# Altium PCB PCB1.PcbDoc
Units mm, origin at the board's own origin, x right, y up, seen from the top; angles counter-clockwise.
Board outline 59.94 x 41.4 mm, 2 copper layers (Top Layer, Bottom Layer); 17 components, 10 nets, 49 pads, 10 vias.
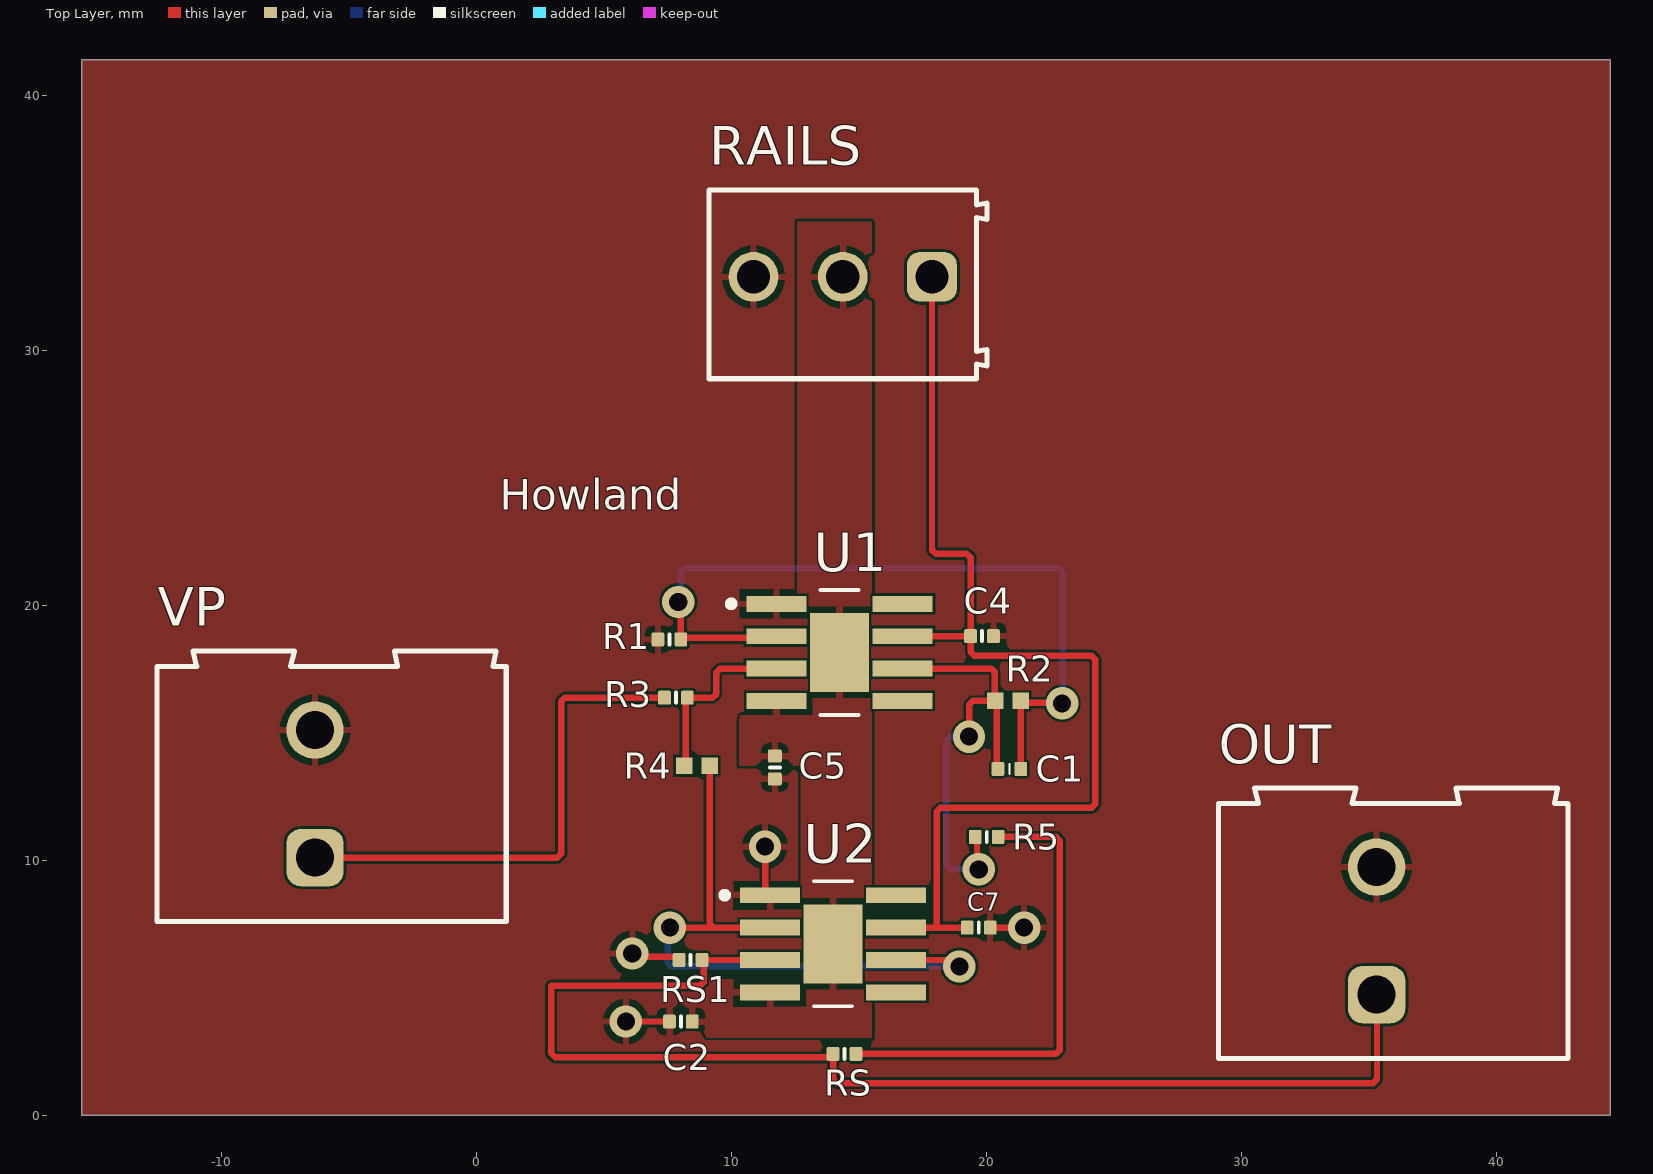
[diagram p0: Top Layer view]
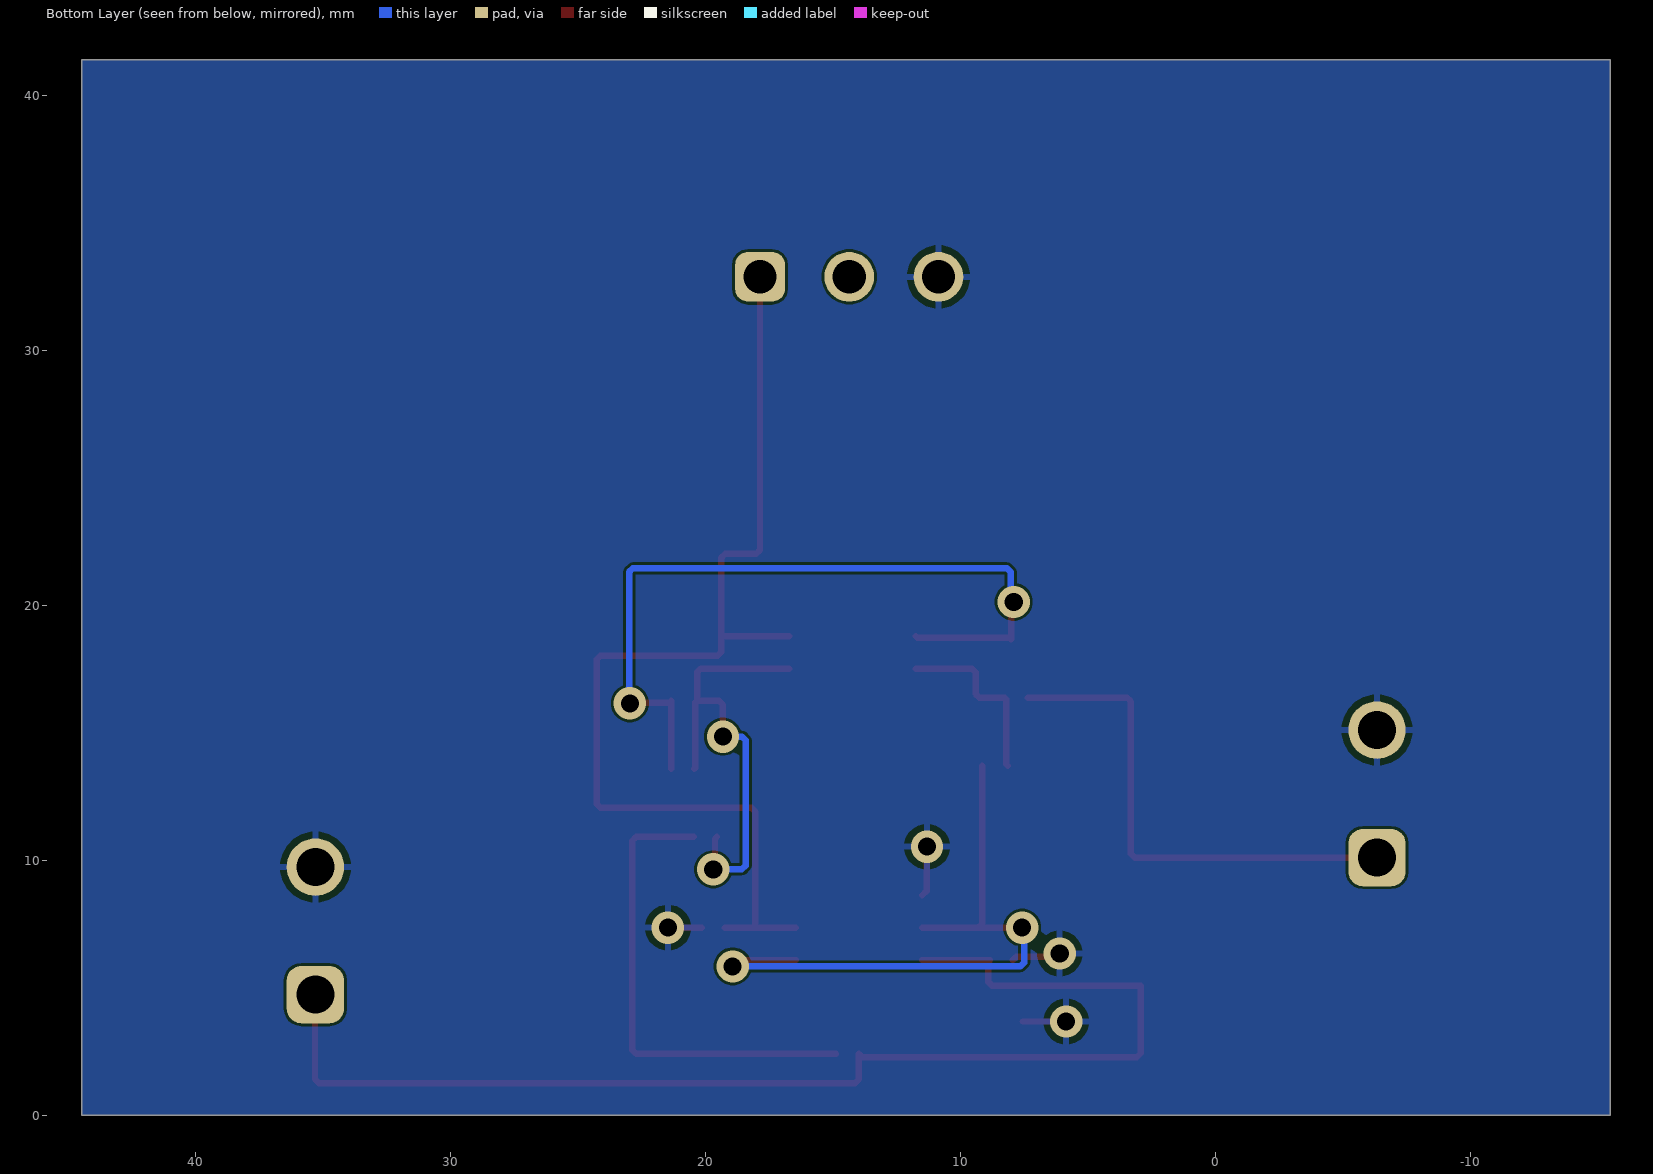
[diagram p1: Bottom Layer view, seen from below]
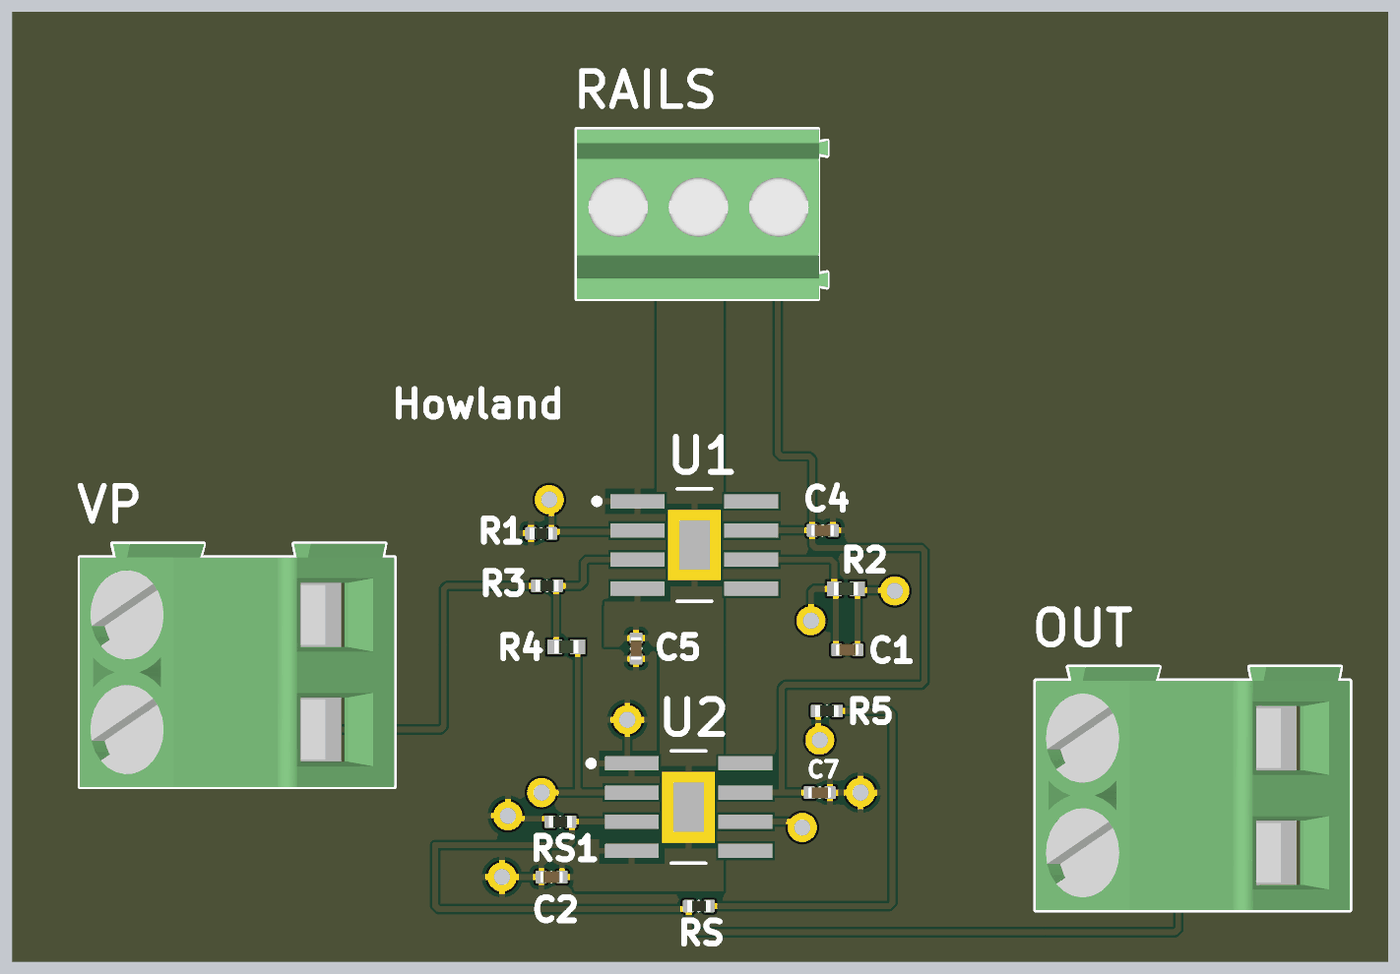
[diagram p2: 3D render of the assembled board from above, using the file's embedded part models]

## Layer stack, top to bottom
Top Solder: solder mask 0.0102, Solder Resist, Dk 3.5
Top Layer: signal copper 0.0356
Dielectric 1: dielectric 0.32, FR-4, Dk 4.8
Bottom Layer: signal copper 0.0356
Bottom Solder: solder mask 0.0102, Solder Resist, Dk 3.5

## Board outline
-15.494,0 44.45,0 44.45,41.402 -15.494,41.402

## Design rules (kind name [scope] priority, off if disabled: settings)
Clearance [All] p1: gap=0.102 ignorepadtopadclearanceinfootprint=FALSE
MinimumSolderMaskSliver [All] p1: minsoldermaskwidth=0.102
PolygonConnect [All] p1: connectstyle=Relief reliefconductorwidth=0.254 reliefentries=4 polygonreliefangle="90 Angle" airgapwidth=0.254
RoutingVias [All] p1: holewidth=0.711 width=1.27 viastyle="Through Hole" minholewidth=0.711 minwidth=1.27 maxholewidth=0.711 maxwidth=1.27
SilkToSilkClearance [All] p1: silktosilkclearance=0.102
SilkToSolderMaskClearance [IsPad] p1: minsilkscreentomaskgap=0.102 clearancetoexposedcopper=TRUE
SolderMaskExpansion [All] p1: expansion=0.102 istentingtop=FALSE
SupplyNets "Schematic Supply Nets_3" [InNet('-30V')] p1: voltage=0.000
SupplyNets "Schematic Supply Nets_2" [InNet('GND')] p2: voltage=0.000
SupplyNets "Schematic Supply Nets_1" [InNet('+30V')] p3: voltage=0.000
SupplyNets "Schematic Supply Nets" [InNet('Vp')] p4: voltage=0.000
Width [All] p1: maxlimit=0.254 minlimit=0.254 preferedwidth=0.254
27 further rules are at their usual default settings.

## Classes and differential pairs
component class HowlandSchematic1: C1 C2 C4 C5 C7 R1 R2 R3 R4 R5 RS RS1 U1 U2

## Components (designator, comment, footprint, x,y, rotation, side; value= is the part's Value field where it differs from the comment)
C1 "Capacitor 22pF +/-10% 50V 0402" "Copy of CAPC0402(1005)60_L" 20.886,13.589 r180 top value=22pF
C2 "Capacitor 100nF +/-20% 25V 0402" CAPC0402(1005)60_L 8.001,3.683 r180 top value=100nF
C4 "Capacitor 100nF +/-20% 10V 0402" CAPC0402(1005)60_L 19.812,18.796 r180 top value=100nF
C5 "Capacitor 100nF +/-20% 25V 0402" CAPC0402(1005)60_L 11.684,13.647 r90 top value=100nF
C7 "Capacitor 100nF +/-20% 10V 0402" CAPC0402(1005)60_L 19.685,7.366 r180 top value=100nF
OUT "691211720002" 691211720002 35.941,7.239 r90 top
R1 "Resistor 10K  +/-1 % 0402 63 mW" RESC0402(1005)_L 7.551,18.669 r0 top value=10k
R2 "Resistor 100k +/-1% 0402 63 mW" RESC1005X40X25ML05T05 20.828,16.256 r180 top value=100k
R3 "Resistor 10K  +/-1 % 0402 63 mW" RESC0402(1005)_L 7.805,16.383 r0 top value=10k
R4 "Resistor 100k +/-1% 0402 63 mW" RESC1005X40X25ML05T05 8.636,13.716 r180 top value=100k
R5 "Resistor 100R +/-1 % 0402 63 mW" RESC0402(1005)_L 19.997,10.922 r0 top value=100
RAILS "691214110003" 691214110003 14.351,32.593 r180 top
RS "Resistor 5K6  +/-5 % 0402 63 mW" RESC0402(1005)_L 14.42,2.413 r0 top value=5.6k
RS1 "Resistor 5K6  +/-5 % 0402 63 mW" RESC0402(1005)_L 8.382,6.096 r0 top value=5.6k
U1 "OPA455IDDA" DDA0008J-IPC_A 14.224,18.161 r0 top
U2 "OPA455IDDA" DDA0008J-IPC_A 13.97,6.731 r0 top
VP "691211720002" 691211720002 -5.7,12.613 r90 top

## Footprints (in the part's own frame and the unit in brackets; to place one, negate y for a bottom-side part, rotate by r counter-clockwise, add the part's x,y. Pads: shape width x height; smd on the part's side, far side on the other; paste and mask are expansions set on the pad)
691211720002 [mm] "5,00mm - modular - green -45¡ã entry with rising cage clamp - 02p"
  rrect50% 2.25x2.25 hole 1.5: 1(-2.5,0.65)
  round 2.25 hole 1.5: 2(2.5,0.65)
  silkscreen extent -5,-6.85 5.6,6.85, body extent -5,-6.85 5.6,6.85, height 15.72
691214110003 [mm] "3.50 mm Horizontal Entry Modular, 3p"
  rrect50% 1.95x1.95 hole 1.3: 1(-3.5,-0.3)
  round 1.95 hole 1.3: 2(0,-0.3) 3(3.5,-0.3)
  silkscreen extent -5.65,-3.7 5.25,3.7, body extent -5.7,-3.7 5.25,3.7, height 8.55
CAPC0402(1005)60_L [mm] "Chip Capacitor, Body 1.0x0.5mm, Height 0.6mm, IPC High Density"
  rrect25% 0.5x0.55 smd: 1(-0.45,0) 2(0.45,0)
  silkscreen extent 0,-0.2 0,0.2, body extent -0.5,-0.25 0.5,0.25, height 0.6
"Copy of CAPC0402(1005)60_L" [mm] "Chip Capacitor, Body 1.0x0.5mm, Height 0.6mm, IPC High Density"
  rrect25% 0.5x0.55 smd: 1(-0.45,0) 2(0.45,0)
  silkscreen extent 0,-0.2 0,0.2, body extent -0.5,-0.25 0.5,0.25, height 0.6
DDA0008J-IPC_A [mm]
  rect 2.353x0.622 smd paste+0 mask+0: 1(-2.477,1.905) 2(-2.477,0.635) 3(-2.477,-0.635) 4(-2.477,-1.905) 5(2.477,-1.905) 6(2.477,-0.635) 7(2.477,0.635) 8(2.477,1.905)
  rect 2.3x3.1 smd paste-1.537 mask+0: 9(0,0)
  silkscreen extent -4.37,-2.45 0.75,2.45
RESC0402(1005)_L [mm] "Chip Resistor, Body 1.0x0.5mm, IPC High Density"
  rrect25% 0.5x0.55 smd: 1(-0.45,0) 2(0.45,0)
  silkscreen extent 0,-0.2 0,0.2, body extent -0.5,-0.25 0.5,0.25, height 0.3
RESC1005X40X25ML05T05 [mm] "Chip Resistor, 2-Leads, Body 1.05x0.55mm, IPC Low Density"
  rect 0.65x0.65 smd: 1(-0.5,0) 2(0.5,0)
  body extent -0.53,-0.28 0.53,0.28, height 0.4

## Part data
C1: library part CMP-001-00073-4, "Chip Capacitor, 22pF +/-10%, 50V, 0402, Thickness 0.6 mm", Case/Package=0402, Max Operating Temperature=85°C, Min Operating Temperature=-55°C, Tolerance=10%, Voltage Rating=50V, Mounting Technology=SMT, Pins=2
C2 C5: library part CMP-001-00065-4, "Chip Capacitor, 100nF +/-20%, 25V, 0402, Thickness 0.6 mm", Case/Package=0402, Max Operating Temperature=85°C, Min Operating Temperature=-55°C, Tolerance=10%, Voltage Rating=25V, Mounting Technology=SMT, Pins=2
C4 C7: library part CMP-001-00061-3, "Chip Capacitor, 100nF +/-20%, 10V, 0402, Thickness 0.6 mm", Case/Package=0402, Max Operating Temperature=85°C, Min Operating Temperature=-55°C, Tolerance=20%, Voltage Rating=10V, Mounting Technology=SMT, Pins=2
OUT VP: library part CMP-1502-02524-3, "211 Series 5MM Pitch Straight, Pcb Terminal Block, Through Hole, 2 Way", Color=Green, Current=10A, Max Operating Temperature=105°C, Min Operating Temperature=-40°C, Voltage=300V, Connector Type="PCB, Terminal Block", Contact Material=Brass, Contact Plating=Tin, Height=15.5mm, Housing Material=Nylon, Lead Pitch=5mm, Length=13.7mm, Mount="Through Hole", Number of Contacts=2, Number of Levels=1, Number of Pins=2, Number of Positions Per Level=2, Packaging=Box, Pitch=5.0038mm, Plating="Brass, Steel", REACH SVHC=Unknown, RoHS=Compliant, Stripping Length=-7mm, Termination=Screw, Width=10mm, Wire Gauge (Max)=24AWG, Wire Gauge (Min)=12AWG, Wire/Cable Gauge=12AWG
R1 R3: library part CMP-009-00149-3, "Chip Resistor, 10 kOhms, +/-1 %, 63 mW, -55 to 125 degC, 0402", Case/Package=0402, Max Operating Temperature=155°C, Min Operating Temperature=-55°C, Power=63mW, Tolerance=1%, Pins=2
R2 R4: library part CMP-009-00021-5, "Chip Resistor, 100 KOhm, +/- 1%, 0.063 W, -55 to 155 degC, 0402 (1005 Metric)", Case/Package=0402, Max Operating Temperature=155°C, Min Operating Temperature=-55°C, Power=63mW, Tolerance=1%, Voltage Rating=50V, Mounting Technology=SM, Pins=2, RoHS Compliant=True
R5: library part CMP-009-00167-3, "Chip Resistor, 100 Ohms, +/-1 %, 63 mW, -55 to 155 degC, 0402", Case/Package=0402, Max Operating Temperature=155°C, Min Operating Temperature=-55°C, Power=63mW, Tolerance=1%, Pins=2
RAILS: library part CMP-1502-02466-3, "2141 Series 3.5MM Pitch Straight, Pcb Terminal Block, Through Hole, 3 Way", Color="Blue, Green", Current=10A, Max Operating Temperature=105°C, Min Operating Temperature=-40°C, Voltage=300V, Contact Material=Brass, Contact Plating="Brass, Tin", Current Rating=10A, Height=12.2mm, Housing Material=Nylon, Lead Pitch=3.5mm, Length=7.4mm, Mount="Through Hole", Number of Contacts=3, Number of Levels=1, Number of Pins=3, Number of Positions Per Level=3, Packaging=Box, Pitch=3.5052mm, Plating="Brass, Steel", RoHS=Compliant, Stripping Length=-6mm, Termination=Screw, Voltage Rating=300V, Width=10.9mm, Wire Gauge (Max)=24AWG, Wire Gauge (Min)=16AWG, Wire/Cable Gauge=24AWG
RS RS1: library part CMP-009-00136-3, "Chip Resistor, 5,6 kOhms, +/-5 %, 63 mW, -55 to 155 degC, 0402", Case/Package=0402, Max Operating Temperature=155°C, Min Operating Temperature=-55°C, Power=63mW, Tolerance=5%, Pins=2
U1 U2: "150-V, wide bandwidth 6.5-MHz, high-slew rate 32-V/Âµs unity-gain stable op amp 8-SO PowerPAD -40 to 85", Manufacturer_Name="Texas Instruments", Copyright="Copyright (C) 2026 Ultra Librarian. All rights reserved.", Datasheet=https://www.ti.com/lit/gpn/opa455, Manufacturer_Part_Number=OPA455IDDA, RefDes=RefDes, Type=TYPE

## Via types
v1: diameter 1.27, hole 0.711, Top Layer to Bottom Layer, 10 vias

## Nets (pads, with @x,y where several pads share a name; then routed paths per layer and width w, separated by ;. In a path a pad name is that pad's centre, name@x,y a point inside that pad or via, vN(x,y) a via of type N, cw(c..) or ccw(c..) an arc to the next point about the centre after c; other vN are vias at no path point)
+30V: C4.2 C7.2 RAILS.1 U1.7 U2.7 | length 43.1
  Top Layer w0.254: U2.7 18.034,7.366 ; U1.7 C4.2 ; RAILS.1 17.851,22.178 18,22.029 19.213,22.029 19.362,21.88 C4.2 ; C7.2 18.034,7.366 ; 18.034,7.366 18.034,11.916 18.183,12.065 24.108,12.065 24.257,12.214 24.257,17.885 24.108,18.034 19.511,18.034 19.362,18.183 C4.2
-30V: C2.1 C5.2 RAILS.2 U1.4 U1.9 U2.4 U2.9
GND: C2.2 C4.1 C5.1 C7.1 OUT.2 R1.1 RAILS.3 RS1.1 U1.1 U2.1 VP.2 | length 7
  Top Layer w0.254: v1(5.842,3.683) C2.2 ; v1(6.096,6.35) 6.223,6.223 7.809,6.223 7.932,6.1 RS1.1 ; v1(11.303,10.541) 11.303,8.82 11.487,8.636 U2.1 ; C7.1 v1(21.463,7.366)
LOAD: OUT.1 RS1.2 RS.1 U2.3 | length 49.2
  Top Layer w0.254: U2.3 RS1.2 8.89,6.038 8.89,5.229 8.741,5.08 2.921,5.08 2.921,2.435 3.07,2.286 13.847,2.286 13.97,2.409 RS.1 13.97,1.419 14.119,1.27 35.157,1.27 35.306,1.419 35.306,4.724 OUT.1
NetC1_1: C1.1 R1.2 R2.1 U1.2 | length 31.4
  Top Layer w0.254: v1@8.014,20.078 7.901,20.217 v1(7.901,20.14) 7.916,20.059 8.001,19.61 R1.2 8.064,18.732 11.684,18.732 U1.2 ; C1.1 21.332,13.593 21.332,16.252 R2.1 21.391,16.192 22.924,16.192 v1@22.987,16.129
  Bottom Layer w0.254: v1@8.014,20.078 8.014,21.314 8.163,21.463 22.838,21.463 22.987,21.314 v1@22.987,16.129
  other v1: 22.955,16.161
NetC1_2: C1.2 R2.2 R5.1 U1.6 | length 18.4
  Top Layer w0.254: U1.6 20.171,17.526 20.32,17.377 20.32,16.264 20.382,16.202 20.382,13.643 C1.2 ; v1(19.304,14.859) 19.304,16.107 19.453,16.256 R2.2 ; R5.1 19.616,10.853 19.616,9.721 v1(19.685,9.652)
  Bottom Layer w0.254: v1(19.304,14.859) 18.564,14.859 18.415,14.71 18.415,9.801 18.564,9.652 v1(19.685,9.652)
NetR3_2: R3.2 R4.2 U1.3 | length 7.2
  Top Layer w0.254: R4.2 8.196,13.776 8.196,16.324 R3.2 9.249,16.383 9.398,16.532 9.398,17.377 9.547,17.526 U1.3
NetR4_1: R4.1 U2.2 U2.6 | length 25.8
  Top Layer w0.254: v1(7.568,7.366) 9.285,7.366 ; R4.1 9.136,7.515 9.285,7.366 ; U2.2 9.285,7.366 ; U2.6 18.467,6.096 18.721,5.842 v1(18.923,5.842)
  Bottom Layer w0.254: v1(7.568,7.366) 7.493,7.291 7.493,5.991 7.642,5.842 v1(18.923,5.842)
NetR5_2: R5.2 RS.2 | length 18.7
  Top Layer w0.254: RS.2 22.711,2.413 22.86,2.562 22.86,10.773 22.711,10.922 R5.2
Vp: R3.1 VP.1 | length 19.8
  Top Layer w0.254: VP.1 3.153,10.113 3.302,10.262 3.302,16.234 3.451,16.383 R3.1
pads on no net: U1.5 U1.8 U2.5 U2.8

## Polygon pours and split planes (outlines as drawn)
GND on Top Layer "GND_L01_P001" (solid, pour order 1): 44.45,41.402 44.45,0 -15.494,0 -15.494,41.402
-30V on Top Layer "-30V_L01_P000" (solid, pour order 0): 15.494,35.052 15.494,3.048 8.001,3.048 8.001,5.334 8.128,5.334 8.255,5.334 12.7,5.334 12.7,13.716 10.287,13.716 10.287,16.764 10.414,16.891 12.573,16.891 12.573,35.052
GND on Bottom Layer "GND_L02_P002" (solid, pour order 2): -15.494,41.402 44.45,41.402 44.45,0 -15.494,0

## Silkscreen, mask and mechanical layers (free items; w line width, h text height)
Top Overlay:
  text "Howland" at 0.889,23.749 h1.2